# EAGLE board breakout (EAGLE 6.5.0)
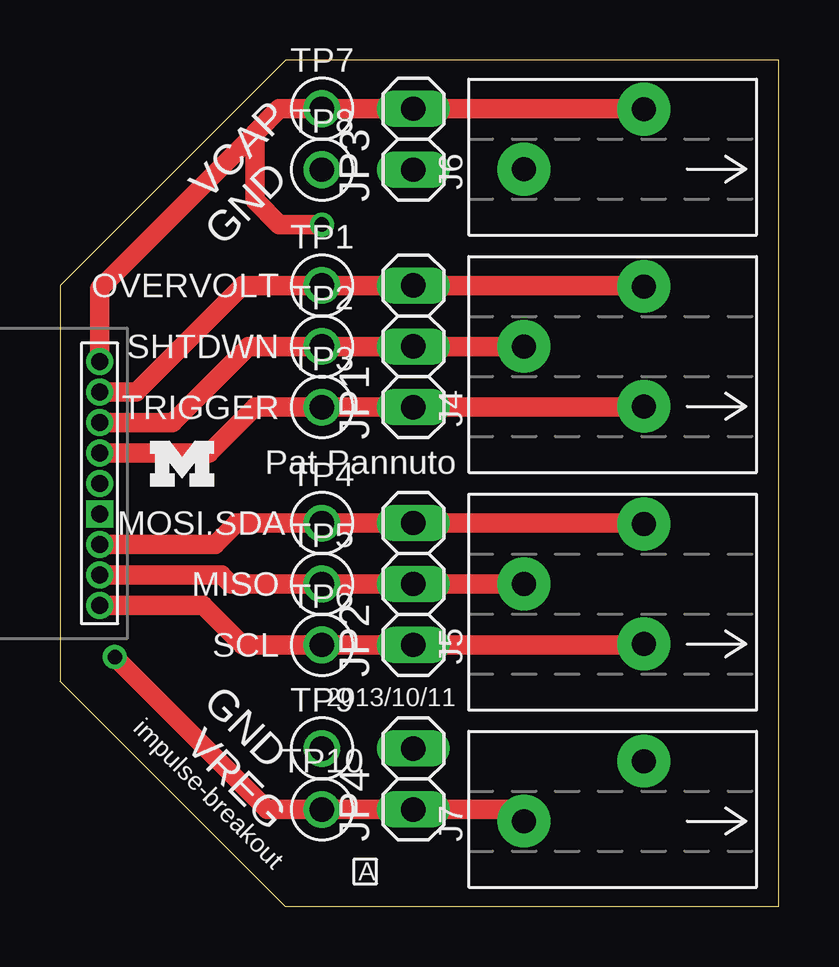
[diagram p0: board, top side]
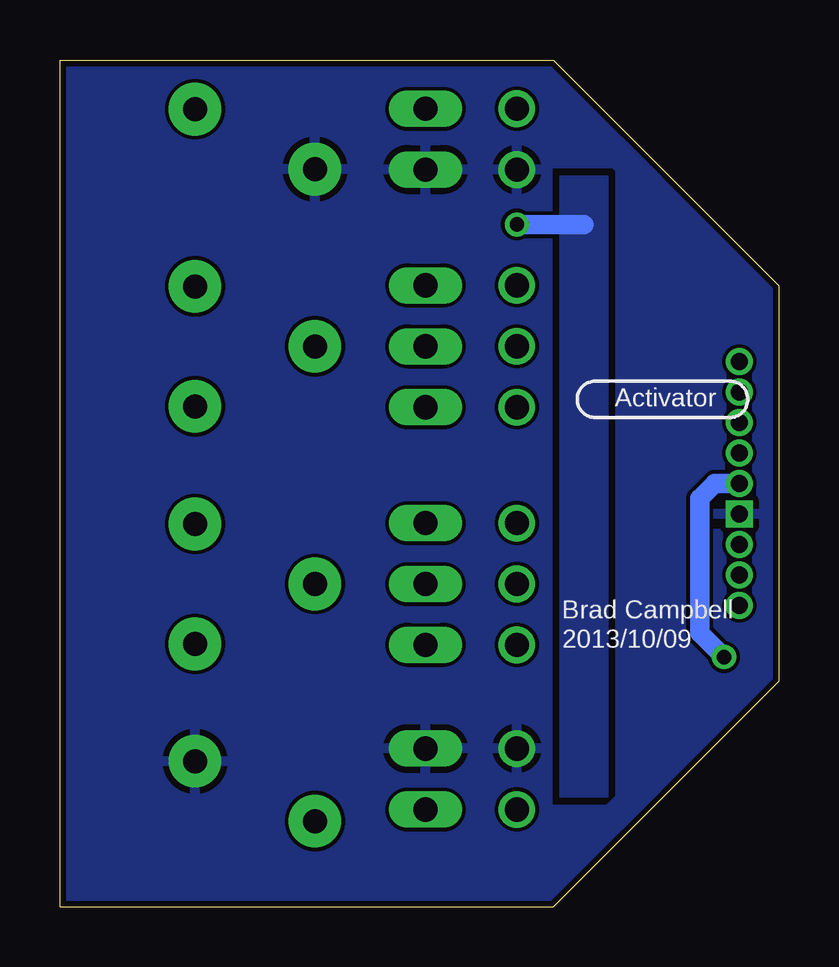
[diagram p1: board, bottom side, seen from below]

Size 29.97 x 35.31 mm. Coordinates in mm from the lower left corner, seen from the top.
Outline: 29.97,0 29.97,35.31 9.4,35.31 0,25.91 0,9.4 9.4,0 29.97,0
Copper layers (1*16): Top 0.0178mm / dielectric 12mil / Bottom 0.0178mm
Design rules "sunstone-4lyr_v1.0.0.3 *": minimum track width 6mil, minimum drill 8mil, track to track 6mil, track to pad 6mil, pad to pad 6mil, via to via 6mil, smd to smd 6mil, copper to edge 10mil, drill to drill 16mil, minimum pad ring 8mil, minimum via ring 8mil, stop-mask expansion 3mil, vias tented up to drill 8mil, thermal gap 10mil
tRestrict: area 10,11.9 to 10.1,12.4; area 10.5,11.9 to 10.6,12.4; area 25.8,18.4 to 26.2,18.5

## Footprints (pad centres in the part's own frame; a part is rotated, then mirrored left to right if it is on the bottom)
HEADER1X9/0.05IN = drill 0.711 pad 1.016 square: 0 -1.27,0 | drill 0.711 pad 1.016: 1 0,0; 2 1.27,0; 3 2.54,0; 4 3.81,0; 5 5.08,0; -1 -2.54,0; -2 -3.81,0; -3 -5.08,0
1X3/PTSA-ZZ_2.5MM = drill 1 pad 2.2: 1 -2.5,-2.5; 2 0,2.5; 3 2.5,-2.5
1X2/PTSA-ZZ_2.5MM = drill 1 pad 2.2: 1 -1.25,2.5; 2 1.25,-2.5
1X03 = drill 1.016 long: 1 -2.54,0; 2 0,0; 3 2.54,0
1X02 = drill 1.016 long: 1 -1.27,0; 2 1.27,0
TESTPOINT_0.040IN = drill 1.016: TESTPOINT 0,0

## Placement (x,y rotation side)
J3  IMPULSE_GECKO_HEADER  [HEADER1X9/0.05IN]  1.65,17.65 90 top
J4  SPRING-TERMINAL_3/PTSA-ZZ_2.5MM  [1X3/PTSA-ZZ_2.5MM]  21.84,23.37 90 top
J5  SPRING-TERMINAL_3/PTSA-ZZ_2.5MM  [1X3/PTSA-ZZ_2.5MM]  21.84,13.46 90 top
J6  SPRING-TERMINAL_2/PTSA-ZZ_2.5MM  [1X2/PTSA-ZZ_2.5MM]  21.84,32 90 top
J7  SPRING-TERMINAL_2/PTSA-ZZ_2.5MM  [1X2/PTSA-ZZ_2.5MM]  21.84,4.83 90 top
JP1  [1X03]  14.73,23.37 90 top
JP2  [1X03]  14.73,13.46 90 top
JP3  [1X02]  14.73,32 90 top
JP4  [1X02]  14.73,5.33 90 top
TP1  TEST_POINT_0.040IN  [TESTPOINT_0.040IN]  10.92,25.91 0 top
TP2  TEST_POINT_0.040IN  [TESTPOINT_0.040IN]  10.92,23.37 0 top
TP3  TEST_POINT_0.040IN  [TESTPOINT_0.040IN]  10.92,20.83 0 top
TP4  TEST_POINT_0.040IN  [TESTPOINT_0.040IN]  10.92,16 0 top
TP5  TEST_POINT_0.040IN  [TESTPOINT_0.040IN]  10.92,13.46 0 top
TP6  TEST_POINT_0.040IN  [TESTPOINT_0.040IN]  10.92,10.92 0 top
TP7  TEST_POINT_0.040IN  [TESTPOINT_0.040IN]  10.92,33.27 0 top
TP8  TEST_POINT_0.040IN  [TESTPOINT_0.040IN]  10.92,30.73 0 top
TP9  TEST_POINT_0.040IN  [TESTPOINT_0.040IN]  10.92,6.6 0 top
TP10  TEST_POINT_0.040IN  [TESTPOINT_0.040IN]  10.92,4.06 0 top
U$1  UMICH_SOLID_SMALL  [UMICH_SOLID_75MIL]  3.76,17.53 0 top

## Library data of the parts
J3 = gecko
J4 J5 = headers; DIGIKEY: 277-1795-ND
J6 J7 = headers; DIGIKEY: 277-1794-ND
JP1-JP4 = pinhead
TP1-TP10 = headers; DIGIKEY: 5001K-ND
U$1 = logos

## Nets
GND: J3.0 J6.1 J7.2 JP3.1 JP4.2 TP8.TESTPOINT TP9.TESTPOINT
MISO0: J3.-2 J5.2 JP2.2 TP5.TESTPOINT
MOSI0: J3.-1 J5.3 JP2.3 TP4.TESTPOINT
OV: J3.4 J4.3 JP1.3 TP1.TESTPOINT
SCLK0: J3.-3 J5.1 JP2.1 TP6.TESTPOINT
SHD: J3.3 J4.2 JP1.2 TP2.TESTPOINT
TRIG: J3.2 J4.1 JP1.1 TP3.TESTPOINT
VCAP: J3.5 J6.2 JP3.2 TP7.TESTPOINT
VCC: J3.1 J7.1 JP4.1 TP10.TESTPOINT

## Tracks (layer width: path | path; a pad name or v marks a point on that pad's centre or on a via)
GND
  pour Bottom: 6.6,1.27 6.6,34.29 -1.02,26.67 -1.02,8.89
  pour Bottom: 6.35,33.78 6.35,30.48 6.86,30.99 9.65,30.99 9.65,4.06 7.11,4.06 6.35,4.83 6.35,1.78 9.14,-1.02 30.73,-1.02 30.73,36.07 8.89,36.07
MISO0
  Top 0.813: J3.-2 6.73,13.84 7.11,13.46 TP5.TESTPOINT JP2.2 J5.2
MOSI0
  Top 0.406: 24.3,16 J5.3
  Top 0.813: J3.-1 6.48,15.11 7.37,16 TP4.TESTPOINT JP2.3 24.3,16
OV
  Top 0.406: 24.3,25.91 J4.3
  Top 0.813: J3.4 3.17,21.46 7.62,25.91 TP1.TESTPOINT JP1.3 24.3,25.91
SCLK0
  Top 0.406: 24.3,10.92 J5.1
  Top 0.813: J3.-3 5.97,12.57 7.62,10.92 TP6.TESTPOINT JP2.1 24.3,10.92
SHD
  Top 0.813: J3.3 4.7,20.19 7.87,23.37 TP2.TESTPOINT JP1.2 J4.2
TRIG
  Top 0.406: 24.3,20.83 J4.1
  Top 0.813: J3.2 6.22,18.92 8.13,20.83 TP3.TESTPOINT JP1.1 24.3,20.83
VCAP  (via drill 0.6)
  Top 0.406: 24.32,33.27 J6.2
  Top 0.813: J3.5 1.65,25.78 8.13,32.26 | 8.13,32.26 9.14,33.27 TP7.TESTPOINT JP3.2 24.32,33.27 | 8.13,32.26 8.13,29.46 9.14,28.45 v10.92,28.45
  Bottom 0.813: v10.92,28.45 8.13,28.45
  pour Bottom: 9.14,30.48 7.11,30.48 7.11,4.57 9.14,4.57
VCC  (via drill 0.6)
  Top 0.813: J7.1 18.86,4.06 JP4.1 TP10.TESTPOINT 8.64,4.06 v2.29,10.41
  Bottom 0.813: v2.29,10.41 3.3,11.43 3.3,17.02 2.67,17.65 J3.1

## Text on the board
tPlace: VCAP | GND | OVERVOLT | SHTDWN | TRIGGER | Pat Pannuto | MOSI.SDA | MISO | SCL | 2013/10/11 | GND | VREG | impulse-breakout | A
bPlace: Activator | Brad Campbell | 2013/10/09
tDocu: Smallest tantalum / is 1.4mm between / pads on bottom | VCAP | OVERVOLT | SHUTDOWN | TRIGGER | VREG | GND | MOSI | MISO | SCL